# Altium PCB Test.PcbDoc (part 4 of 4)
Units mm, origin at the board's own origin, x right, y up, seen from the top; angles counter-clockwise.
Board outline 152.4 x 101.6 mm, 4 copper layers (Top Layer 1, Top Layer, Bottom Layer, Bottom Layer 1), stack 0.603 mm thick; 308 components, 154 nets, 859 pads, 6474 vias.
Unrouted connection lines stored in the file: 683.
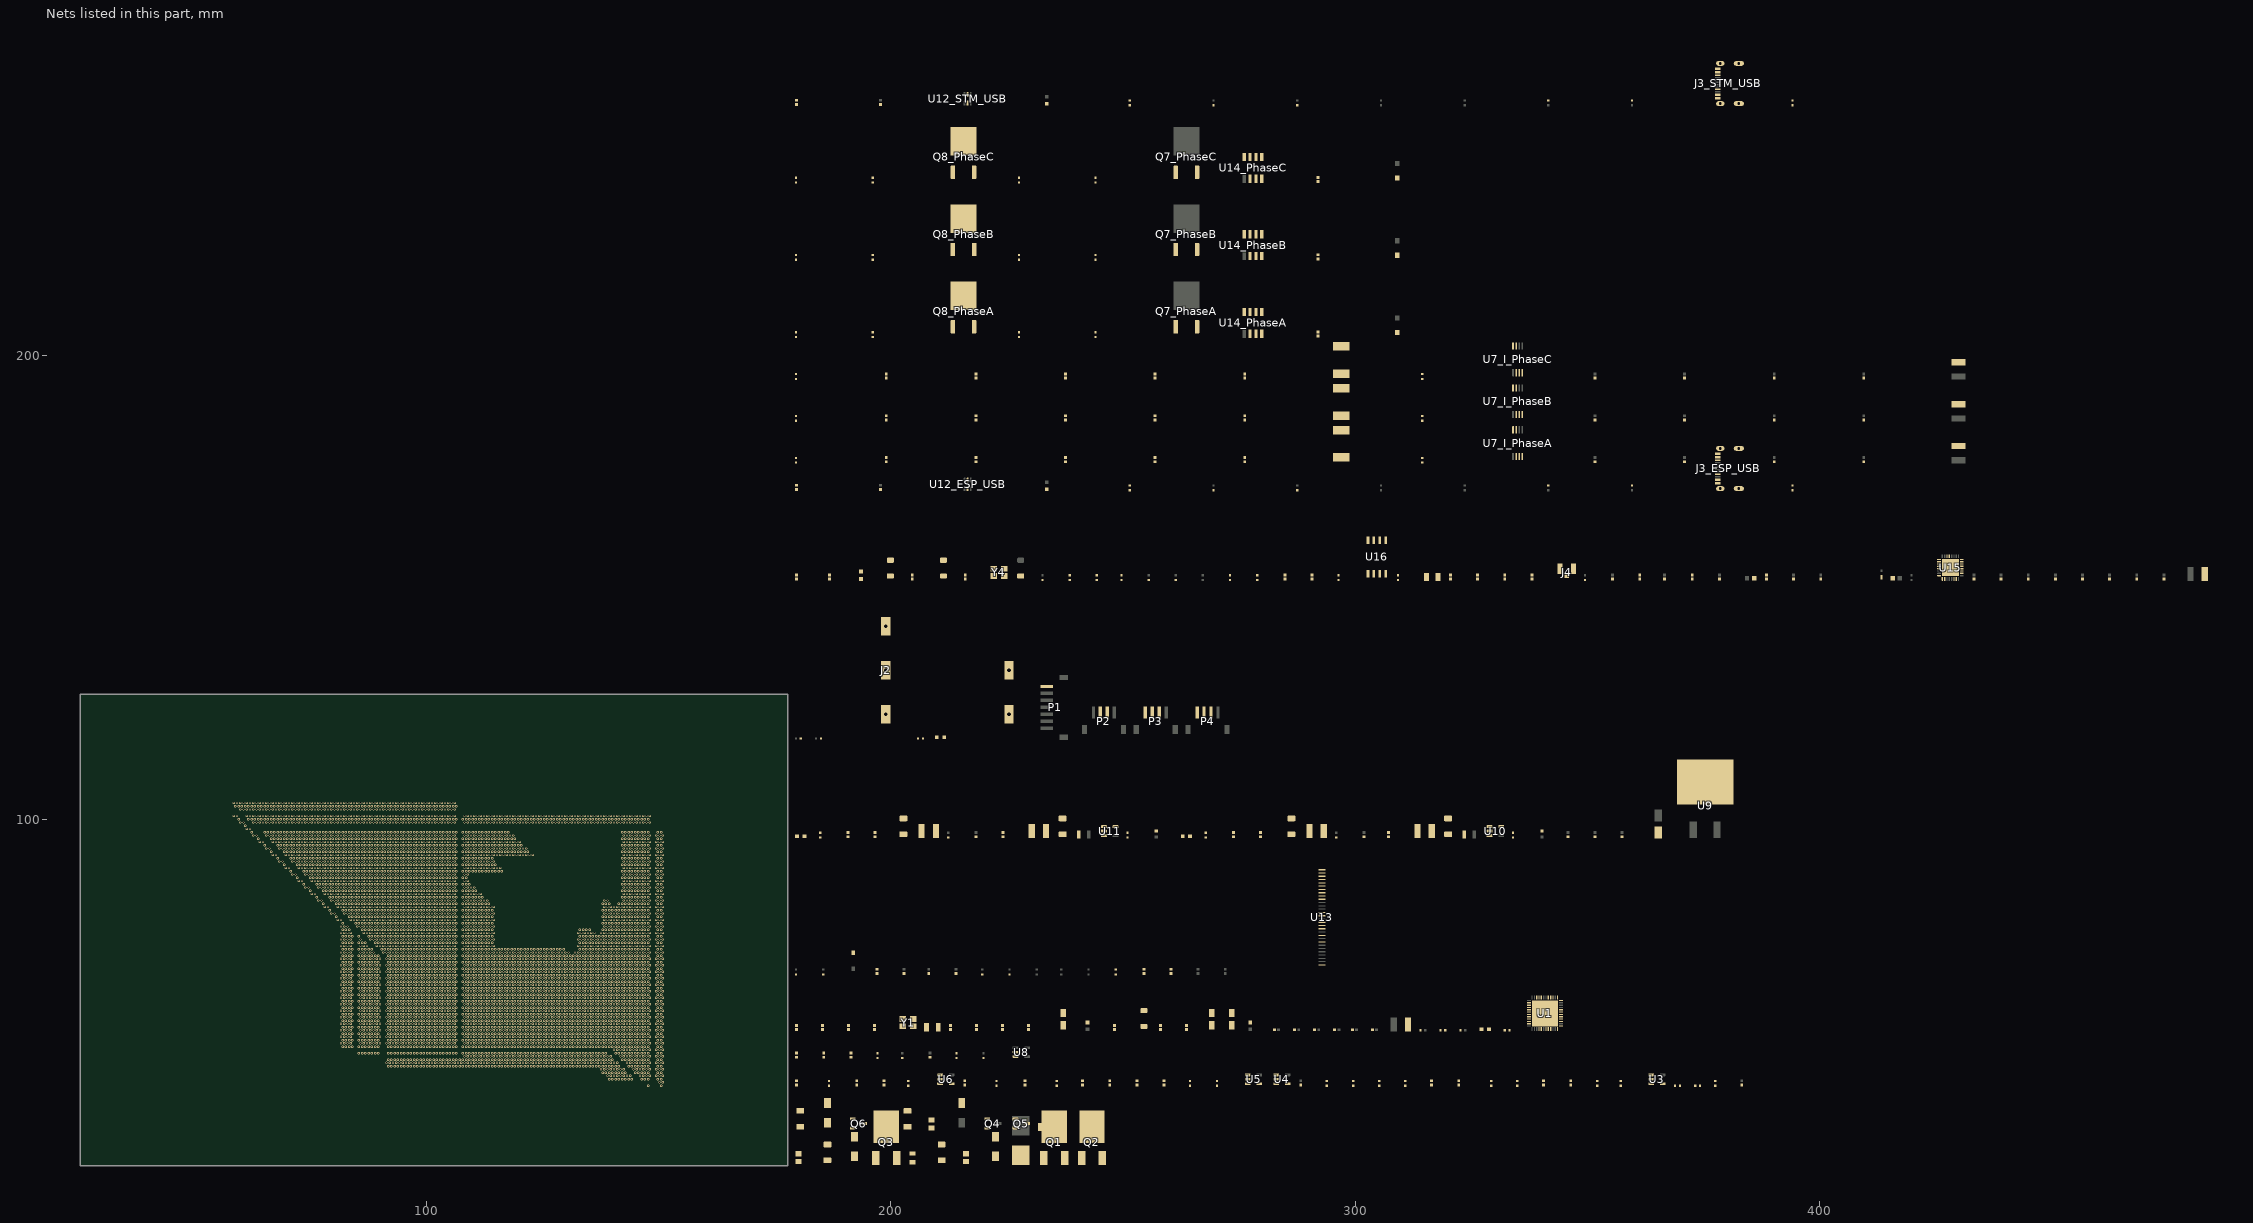
[diagram p6: the nets of this part, all layers, seen from the top]

## Via types
v1: diameter 0.5, hole 0.3, Top Layer 1 to Bottom Layer 1, tented both sides, 6470 vias
v2: diameter 1.27, hole 0.711, Top Layer 1 to Bottom Layer 1, 4 vias

## Nets (pads, with @x,y where several pads share a name; then routed paths per layer and width w, separated by ;. In a path a pad name is that pad's centre, name@x,y a point inside that pad or via, vN(x,y) a via of type N, cw(c..) or ccw(c..) an arc to the next point about the centre after c; other vN are vias at no path point) (continued)
GND: (continued)
  other v1: 75.95,84 78.05,84 78.75,84 79.45,84 80.15,84 80.85,84 81.55,84 82.25,84 82.95,84 83.65,84 84.35,84 85.05,84 85.75,84 86.45,84 87.15,84 87.85,84 88.55,84 89.25,84 89.95,84 90.65,84 91.35,84 92.05,84 92.75,84 93.45,84 94.15,84 94.85,84 95.55,84 96.25,84 96.95,84 97.65,84 98.35,84 99.05,84 99.75,84 100.45,84 101.15,84 101.85,84 102.55,84 103.25,84 103.95,84 104.65,84 105.35,84 106.05,84 108.15,84 108.85,84 109.55,84 110.25,84 110.95,84 111.65,84 142.45,84 143.15,84 143.85,84 144.55,84 145.25,84 145.95,84 146.65,84 147.35,84 148.05,84 149.45,84 150.15,84 150.85,84 74.9,84.7 77.7,84.7 78.4,84.7 79.1,84.7 79.8,84.7 80.5,84.7 81.2,84.7 81.9,84.7 82.6,84.7 83.3,84.7 84,84.7 84.7,84.7 85.4,84.7 86.1,84.7 86.8,84.7 87.5,84.7 88.2,84.7 88.9,84.7 89.6,84.7 90.3,84.7 91,84.7 91.7,84.7 92.4,84.7 93.1,84.7 93.8,84.7 94.5,84.7 95.2,84.7 95.9,84.7 96.6,84.7 97.3,84.7 98,84.7 98.7,84.7 99.4,84.7 100.1,84.7 100.8,84.7 101.5,84.7 102.2,84.7 102.9,84.7 103.6,84.7 104.3,84.7 105,84.7 105.7,84.7 106.4,84.7 107.8,84.7 108.5,84.7 109.2,84.7 109.9,84.7 110.6,84.7 142.1,84.7 142.8,84.7 143.5,84.7 144.2,84.7 144.9,84.7 145.6,84.7 146.3,84.7 147,84.7 147.7,84.7 149.8,84.7 150.5,84.7 73.85,85.4 74.55,85.4 76.65,85.4 77.35,85.4 78.05,85.4 78.75,85.4 79.45,85.4 80.15,85.4 80.85,85.4 81.55,85.4 82.25,85.4 82.95,85.4 83.65,85.4 84.35,85.4 85.05,85.4 85.75,85.4 86.45,85.4 87.15,85.4 87.85,85.4 88.55,85.4 89.25,85.4 89.95,85.4 90.65,85.4 91.35,85.4 92.05,85.4 92.75,85.4 93.45,85.4 94.15,85.4 94.85,85.4 95.55,85.4 96.25,85.4 96.95,85.4 97.65,85.4 98.35,85.4 99.05,85.4 99.75,85.4 100.45,85.4 101.15,85.4 101.85,85.4 102.55,85.4 103.25,85.4 103.95,85.4 104.65,85.4 105.35,85.4 106.05,85.4 108.15,85.4 108.85,85.4 109.55,85.4 110.25,85.4 142.45,85.4 143.15,85.4 143.85,85.4 144.55,85.4 145.25,85.4 145.95,85.4 146.65,85.4 147.35,85.4 148.05,85.4 149.45,85.4 150.15,85.4 150.85,85.4 73.5,86.1 76.3,86.1 77,86.1 77.7,86.1 78.4,86.1 79.1,86.1 79.8,86.1 80.5,86.1 81.2,86.1 81.9,86.1 82.6,86.1 83.3,86.1 84,86.1 84.7,86.1 85.4,86.1 86.1,86.1 86.8,86.1 87.5,86.1 88.2,86.1 88.9,86.1 89.6,86.1 90.3,86.1 91,86.1 91.7,86.1 92.4,86.1 93.1,86.1 93.8,86.1 94.5,86.1 95.2,86.1 95.9,86.1 96.6,86.1 97.3,86.1 98,86.1 98.7,86.1 99.4,86.1 100.1,86.1 100.8,86.1 101.5,86.1 102.2,86.1 102.9,86.1 103.6,86.1 104.3,86.1 105,86.1 105.7,86.1 106.4,86.1 107.8,86.1 108.5,86.1 109.2,86.1 142.1,86.1 142.8,86.1 143.5,86.1 144.2,86.1 144.9,86.1 145.6,86.1 146.3,86.1 147,86.1 147.7,86.1 149.8,86.1 150.5,86.1 72.45,86.8 73.15,86.8 75.25,86.8 75.95,86.8 76.65,86.8 77.35,86.8 78.05,86.8 78.75,86.8 79.45,86.8 80.15,86.8 80.85,86.8 81.55,86.8 82.25,86.8 82.95,86.8 83.65,86.8 84.35,86.8 85.05,86.8 85.75,86.8 86.45,86.8 87.15,86.8 87.85,86.8 88.55,86.8 89.25,86.8 89.95,86.8 90.65,86.8 91.35,86.8 92.05,86.8 92.75,86.8 93.45,86.8 94.15,86.8 94.85,86.8 95.55,86.8 96.25,86.8 96.95,86.8 97.65,86.8 98.35,86.8 99.05,86.8 99.75,86.8 100.45,86.8 101.15,86.8 101.85,86.8 102.55,86.8 103.25,86.8 103.95,86.8 104.65,86.8 105.35,86.8 106.05,86.8 108.15,86.8 108.85,86.8 142.45,86.8 143.15,86.8 143.85,86.8 144.55,86.8 145.25,86.8 145.95,86.8 146.65,86.8 147.35,86.8 148.05,86.8 149.45,86.8 150.15,86.8 150.85,86.8 72.1,87.5 74.9,87.5 75.6,87.5 76.3,87.5 77,87.5 77.7,87.5 78.4,87.5 79.1,87.5 79.8,87.5 80.5,87.5 81.2,87.5 81.9,87.5 82.6,87.5 83.3,87.5 84,87.5 84.7,87.5 85.4,87.5 86.1,87.5 86.8,87.5 87.5,87.5 88.2,87.5 88.9,87.5 89.6,87.5 90.3,87.5 91,87.5 91.7,87.5 92.4,87.5 93.1,87.5 93.8,87.5 94.5,87.5 95.2,87.5 95.9,87.5 96.6,87.5 97.3,87.5 98,87.5 98.7,87.5 99.4,87.5 100.1,87.5 100.8,87.5 101.5,87.5 102.2,87.5 102.9,87.5 103.6,87.5 104.3,87.5 105,87.5 105.7,87.5 106.4,87.5 107.8,87.5 108.5,87.5 142.1,87.5 142.8,87.5 143.5,87.5 144.2,87.5 144.9,87.5 145.6,87.5 146.3,87.5 147,87.5 147.7,87.5 149.8,87.5 150.5,87.5 71.05,88.2 71.75,88.2 73.85,88.2 74.55,88.2 75.25,88.2 75.95,88.2 76.65,88.2 77.35,88.2 78.05,88.2 78.75,88.2 79.45,88.2 80.15,88.2 80.85,88.2 81.55,88.2 82.25,88.2 82.95,88.2 83.65,88.2 84.35,88.2 85.05,88.2 85.75,88.2 86.45,88.2 87.15,88.2 87.85,88.2 88.55,88.2 89.25,88.2 89.95,88.2 90.65,88.2 91.35,88.2 92.05,88.2 92.75,88.2 93.45,88.2 94.15,88.2 94.85,88.2 95.55,88.2 96.25,88.2 96.95,88.2 97.65,88.2 98.35,88.2 99.05,88.2 99.75,88.2 100.45,88.2 101.15,88.2 101.85,88.2 102.55,88.2 103.25,88.2 103.95,88.2 104.65,88.2 105.35,88.2 106.05,88.2 108.15,88.2 108.85,88.2 142.45,88.2 143.15,88.2 143.85,88.2 144.55,88.2 145.25,88.2 145.95,88.2 146.65,88.2 147.35,88.2 148.05,88.2 149.45,88.2 150.15,88.2 150.85,88.2 70.7,88.9 73.5,88.9 74.2,88.9 74.9,88.9 75.6,88.9 76.3,88.9 77,88.9 77.7,88.9 78.4,88.9 79.1,88.9 79.8,88.9 80.5,88.9 81.2,88.9 81.9,88.9 82.6,88.9 83.3,88.9 84,88.9 84.7,88.9 85.4,88.9 86.1,88.9 86.8,88.9 87.5,88.9 88.2,88.9 88.9,88.9 89.6,88.9 90.3,88.9 91,88.9 91.7,88.9 92.4,88.9 93.1,88.9 93.8,88.9 94.5,88.9 95.2,88.9 95.9,88.9 96.6,88.9 97.3,88.9 98,88.9 98.7,88.9 99.4,88.9 100.1,88.9 100.8,88.9 101.5,88.9 102.2,88.9 102.9,88.9 103.6,88.9 104.3,88.9 105,88.9 105.7,88.9 106.4,88.9 107.8,88.9 108.5,88.9 109.2,88.9 109.9,88.9 110.6,88.9 111.3,88.9 112,88.9 112.7,88.9 113.4,88.9 114.1,88.9 114.8,88.9 115.5,88.9 116.2,88.9 142.1,88.9 142.8,88.9 143.5,88.9 144.2,88.9 144.9,88.9 145.6,88.9 146.3,88.9 147,88.9 147.7,88.9 149.8,88.9 150.5,88.9 69.65,89.6 70.35,89.6 72.45,89.6 73.15,89.6 73.85,89.6 74.55,89.6 75.25,89.6 75.95,89.6 76.65,89.6 77.35,89.6 78.05,89.6 78.75,89.6 79.45,89.6 80.15,89.6 80.85,89.6 81.55,89.6 82.25,89.6 82.95,89.6 83.65,89.6 84.35,89.6 85.05,89.6 85.75,89.6 86.45,89.6 87.15,89.6 87.85,89.6 88.55,89.6 89.25,89.6 89.95,89.6 90.65,89.6 91.35,89.6 92.05,89.6 92.75,89.6 93.45,89.6 94.15,89.6 94.85,89.6 95.55,89.6 96.25,89.6 96.95,89.6 97.65,89.6 98.35,89.6 99.05,89.6 99.75,89.6 100.45,89.6 101.15,89.6 101.85,89.6 102.55,89.6 103.25,89.6 103.95,89.6 104.65,89.6 105.35,89.6 106.05,89.6 108.15,89.6 108.85,89.6 109.55,89.6 110.25,89.6 110.95,89.6 111.65,89.6 112.35,89.6 113.05,89.6 113.75,89.6 114.45,89.6 115.15,89.6 115.85,89.6 142.45,89.6 143.15,89.6 143.85,89.6 144.55,89.6 145.25,89.6 145.95,89.6 146.65,89.6 147.35,89.6 148.05,89.6 149.45,89.6 150.15,89.6 150.85,89.6 69.3,90.3 72.1,90.3 72.8,90.3 73.5,90.3 74.2,90.3 74.9,90.3 75.6,90.3 76.3,90.3 77,90.3 77.7,90.3 78.4,90.3 79.1,90.3 79.8,90.3 80.5,90.3 81.2,90.3 81.9,90.3 82.6,90.3 83.3,90.3 84,90.3 84.7,90.3 85.4,90.3 86.1,90.3 86.8,90.3 87.5,90.3 88.2,90.3 88.9,90.3 89.6,90.3 90.3,90.3 91,90.3 91.7,90.3 92.4,90.3 93.1,90.3 93.8,90.3 94.5,90.3 95.2,90.3 95.9,90.3 96.6,90.3 97.3,90.3 98,90.3 98.7,90.3 99.4,90.3 100.1,90.3 100.8,90.3 101.5,90.3 102.2,90.3 102.9,90.3 103.6,90.3 104.3,90.3 105,90.3 105.7,90.3 106.4,90.3 107.8,90.3 108.5,90.3 109.2,90.3 109.9,90.3 110.6,90.3 111.3,90.3 112,90.3 112.7,90.3 113.4,90.3 114.1,90.3 114.8,90.3 142.1,90.3 142.8,90.3 143.5,90.3 144.2,90.3 144.9,90.3 145.6,90.3 146.3,90.3 147,90.3 147.7,90.3 149.8,90.3 150.5,90.3 68.25,91 68.95,91 71.05,91 71.75,91 72.45,91 73.15,91 73.85,91 74.55,91 75.25,91 75.95,91 76.65,91 77.35,91 78.05,91 78.75,91 79.45,91 80.15,91 80.85,91 81.55,91 82.25,91 82.95,91 83.65,91 84.35,91 85.05,91 85.75,91 86.45,91 87.15,91 87.85,91 88.55,91 89.25,91 89.95,91 90.65,91 91.35,91 92.05,91 92.75,91 93.45,91 94.15,91 94.85,91 95.55,91 96.25,91 96.95,91 97.65,91 98.35,91 99.05,91 99.75,91 100.45,91 101.15,91 101.85,91 102.55,91 103.25,91 103.95,91 104.65,91 105.35,91 106.05,91 108.15,91 108.85,91 109.55,91 110.25,91 110.95,91 111.65,91 112.35,91 113.05,91 113.75,91 114.45,91 142.45,91 143.15,91 143.85,91 144.55,91 145.25,91 145.95,91 146.65,91 147.35,91 148.05,91 149.45,91 150.15,91 150.85,91 67.9,91.7 70.7,91.7 71.4,91.7 72.1,91.7 72.8,91.7 73.5,91.7 74.2,91.7 74.9,91.7 75.6,91.7 76.3,91.7 77,91.7 77.7,91.7 78.4,91.7 79.1,91.7 79.8,91.7 80.5,91.7 81.2,91.7 81.9,91.7 82.6,91.7 83.3,91.7 84,91.7 84.7,91.7 85.4,91.7 86.1,91.7 86.8,91.7 87.5,91.7 88.2,91.7 88.9,91.7 89.6,91.7 90.3,91.7 91,91.7 91.7,91.7 92.4,91.7 93.1,91.7 93.8,91.7 94.5,91.7 95.2,91.7 95.9,91.7 96.6,91.7 97.3,91.7 98,91.7 98.7,91.7 99.4,91.7 100.1,91.7 100.8,91.7 101.5,91.7 102.2,91.7 102.9,91.7 103.6,91.7 104.3,91.7 105,91.7 105.7,91.7 106.4,91.7 107.8,91.7 108.5,91.7 109.2,91.7 109.9,91.7 110.6,91.7 111.3,91.7 112,91.7 112.7,91.7 113.4,91.7 114.1,91.7 142.1,91.7 142.8,91.7 143.5,91.7 144.2,91.7 144.9,91.7 145.6,91.7 146.3,91.7 147,91.7 147.7,91.7 149.8,91.7 150.5,91.7 66.85,92.4 67.55,92.4 69.65,92.4 70.35,92.4 71.05,92.4 71.75,92.4 72.45,92.4 73.15,92.4 73.85,92.4 74.55,92.4 75.25,92.4 75.95,92.4 76.65,92.4 77.35,92.4 78.05,92.4 78.75,92.4 79.45,92.4 80.15,92.4 80.85,92.4 81.55,92.4 82.25,92.4 82.95,92.4 83.65,92.4 84.35,92.4 85.05,92.4 85.75,92.4 86.45,92.4 87.15,92.4 87.85,92.4 88.55,92.4 89.25,92.4 89.95,92.4 90.65,92.4 91.35,92.4 92.05,92.4 92.75,92.4 93.45,92.4 94.15,92.4 94.85,92.4 95.55,92.4 96.25,92.4 96.95,92.4 97.65,92.4 98.35,92.4 99.05,92.4 99.75,92.4 100.45,92.4 101.15,92.4 101.85,92.4 102.55,92.4 103.25,92.4 103.95,92.4 104.65,92.4 105.35,92.4 106.05,92.4 108.15,92.4 108.85,92.4 109.55,92.4 110.25,92.4 110.95,92.4 111.65,92.4 112.35,92.4 113.05,92.4 113.75,92.4 114.45,92.4 115.15,92.4 115.85,92.4 116.55,92.4 117.25,92.4 117.95,92.4 118.65,92.4 119.35,92.4 120.05,92.4 120.75,92.4 121.45,92.4 122.15,92.4 122.85,92.4 142.45,92.4 143.15,92.4 143.85,92.4 144.55,92.4 145.25,92.4 145.95,92.4 146.65,92.4 147.35,92.4 148.05,92.4 149.45,92.4 150.15,92.4 150.85,92.4 66.5,93.1 69.3,93.1 70,93.1 70.7,93.1 71.4,93.1 72.1,93.1 72.8,93.1 73.5,93.1 74.2,93.1 74.9,93.1 75.6,93.1 76.3,93.1 77,93.1 77.7,93.1 78.4,93.1 79.1,93.1 79.8,93.1 80.5,93.1 81.2,93.1 81.9,93.1 82.6,93.1 83.3,93.1 84,93.1 84.7,93.1 85.4,93.1 86.1,93.1 86.8,93.1 87.5,93.1 88.2,93.1 88.9,93.1 89.6,93.1 90.3,93.1 91,93.1 91.7,93.1 92.4,93.1 93.1,93.1 93.8,93.1 94.5,93.1 95.2,93.1 95.9,93.1 96.6,93.1 97.3,93.1 98,93.1 98.7,93.1 99.4,93.1 100.1,93.1 100.8,93.1 101.5,93.1 102.2,93.1 102.9,93.1 103.6,93.1 104.3,93.1 105,93.1 105.7,93.1 106.4,93.1 107.8,93.1 108.5,93.1 109.2,93.1 109.9,93.1 110.6,93.1 111.3,93.1 112,93.1 112.7,93.1 113.4,93.1 114.1,93.1 114.8,93.1 115.5,93.1 116.2,93.1 116.9,93.1 117.6,93.1 118.3,93.1 119,93.1 119.7,93.1 120.4,93.1 121.1,93.1 121.8,93.1 142.1,93.1 142.8,93.1 143.5,93.1 144.2,93.1 144.9,93.1 145.6,93.1 146.3,93.1 147,93.1 147.7,93.1 149.8,93.1 150.5,93.1 65.45,93.8 66.15,93.8 68.25,93.8 68.95,93.8 69.65,93.8 70.35,93.8 71.05,93.8 71.75,93.8 72.45,93.8 73.15,93.8 73.85,93.8 74.55,93.8 75.25,93.8 75.95,93.8 76.65,93.8 77.35,93.8 78.05,93.8 78.75,93.8 79.45,93.8 80.15,93.8 80.85,93.8 81.55,93.8 82.25,93.8 82.95,93.8 83.65,93.8 84.35,93.8 85.05,93.8 85.75,93.8 86.45,93.8 87.15,93.8 87.85,93.8 88.55,93.8 89.25,93.8 89.95,93.8 90.65,93.8 91.35,93.8 92.05,93.8 92.75,93.8 93.45,93.8 94.15,93.8 94.85,93.8 95.55,93.8 96.25,93.8 96.95,93.8 97.65,93.8 98.35,93.8 99.05,93.8 99.75,93.8 100.45,93.8 101.15,93.8 101.85,93.8 102.55,93.8 103.25,93.8 103.95,93.8 104.65,93.8 105.35,93.8 106.05,93.8 108.15,93.8 108.85,93.8 109.55,93.8 110.25,93.8 110.95,93.8 111.65,93.8 112.35,93.8 113.05,93.8 113.75,93.8 114.45,93.8 115.15,93.8 115.85,93.8 116.55,93.8 117.25,93.8 117.95,93.8 118.65,93.8 119.35,93.8 120.05,93.8 120.75,93.8 121.45,93.8 142.45,93.8 143.15,93.8 143.85,93.8 144.55,93.8 145.25,93.8 145.95,93.8 146.65,93.8 147.35,93.8 148.05,93.8 149.45,93.8 150.15,93.8 150.85,93.8 65.1,94.5 67.9,94.5 68.6,94.5 69.3,94.5 70,94.5 70.7,94.5 71.4,94.5 72.1,94.5 72.8,94.5 73.5,94.5 74.2,94.5 74.9,94.5 75.6,94.5 76.3,94.5 77,94.5 77.7,94.5 78.4,94.5 79.1,94.5 79.8,94.5 80.5,94.5 81.2,94.5 81.9,94.5 82.6,94.5 83.3,94.5 84,94.5 84.7,94.5 85.4,94.5 86.1,94.5 86.8,94.5 87.5,94.5 88.2,94.5 88.9,94.5 89.6,94.5 90.3,94.5 91,94.5 91.7,94.5 92.4,94.5 93.1,94.5 93.8,94.5 94.5,94.5 95.2,94.5 95.9,94.5 96.6,94.5 97.3,94.5 98,94.5 98.7,94.5 99.4,94.5 100.1,94.5 100.8,94.5 101.5,94.5 102.2,94.5 102.9,94.5 103.6,94.5 104.3,94.5 105,94.5 105.7,94.5 106.4,94.5 107.8,94.5 108.5,94.5 109.2,94.5 109.9,94.5 110.6,94.5 111.3,94.5 112,94.5 112.7,94.5 113.4,94.5 114.1,94.5 114.8,94.5 115.5,94.5 116.2,94.5 116.9,94.5 117.6,94.5 118.3,94.5 119,94.5 119.7,94.5 120.4,94.5 142.1,94.5 142.8,94.5 143.5,94.5 144.2,94.5 144.9,94.5 145.6,94.5 146.3,94.5 147,94.5 147.7,94.5 149.8,94.5 150.5,94.5 64.05,95.2 64.75,95.2 66.85,95.2 67.55,95.2 68.25,95.2 68.95,95.2 69.65,95.2 70.35,95.2 71.05,95.2 71.75,95.2 72.45,95.2 73.15,95.2 73.85,95.2 74.55,95.2 75.25,95.2 75.95,95.2 76.65,95.2 77.35,95.2 78.05,95.2 78.75,95.2 79.45,95.2 80.15,95.2 80.85,95.2 81.55,95.2 82.25,95.2 82.95,95.2 83.65,95.2 84.35,95.2 85.05,95.2 85.75,95.2 86.45,95.2 87.15,95.2 87.85,95.2 88.55,95.2 89.25,95.2 89.95,95.2 90.65,95.2 91.35,95.2 92.05,95.2 92.75,95.2 93.45,95.2 94.15,95.2 94.85,95.2 95.55,95.2 96.25,95.2 96.95,95.2 97.65,95.2 98.35,95.2 99.05,95.2 99.75,95.2 100.45,95.2 101.15,95.2 101.85,95.2 102.55,95.2 103.25,95.2 103.95,95.2 104.65,95.2 105.35,95.2 106.05,95.2 108.15,95.2 108.85,95.2 109.55,95.2 110.25,95.2 110.95,95.2 111.65,95.2 112.35,95.2 113.05,95.2 113.75,95.2 114.45,95.2 115.15,95.2 115.85,95.2 116.55,95.2 117.25,95.2 117.95,95.2 118.65,95.2 119.35,95.2 120.05,95.2 142.45,95.2 143.15,95.2 143.85,95.2 144.55,95.2 145.25,95.2 145.95,95.2 146.65,95.2 147.35,95.2 148.05,95.2 149.45,95.2 150.15,95.2 150.85,95.2 63.7,95.9 66.5,95.9 67.2,95.9 67.9,95.9 68.6,95.9 69.3,95.9 70,95.9 70.7,95.9 71.4,95.9 72.1,95.9 72.8,95.9 73.5,95.9 74.2,95.9 74.9,95.9 75.6,95.9 76.3,95.9 77,95.9 77.7,95.9 78.4,95.9 79.1,95.9 79.8,95.9 80.5,95.9 81.2,95.9 81.9,95.9 82.6,95.9 83.3,95.9 84,95.9 84.7,95.9 85.4,95.9 86.1,95.9 86.8,95.9 87.5,95.9 88.2,95.9 88.9,95.9 89.6,95.9 90.3,95.9 91,95.9 91.7,95.9 92.4,95.9 93.1,95.9 93.8,95.9 94.5,95.9 95.2,95.9 95.9,95.9 96.6,95.9 97.3,95.9 98,95.9 98.7,95.9 99.4,95.9 100.1,95.9 100.8,95.9 101.5,95.9 102.2,95.9 102.9,95.9 103.6,95.9 104.3,95.9 105,95.9 105.7,95.9 106.4,95.9 107.8,95.9 108.5,95.9 109.2,95.9 109.9,95.9 110.6,95.9 111.3,95.9 112,95.9 112.7,95.9 113.4,95.9 114.1,95.9 114.8,95.9 115.5,95.9 116.2,95.9 116.9,95.9 117.6,95.9 118.3,95.9 119,95.9 142.1,95.9 142.8,95.9 143.5,95.9 144.2,95.9 144.9,95.9 145.6,95.9 146.3,95.9 147,95.9 147.7,95.9 149.8,95.9 150.5,95.9 62.65,96.6 63.35,96.6 65.45,96.6 66.15,96.6 66.85,96.6 67.55,96.6 68.25,96.6 68.95,96.6 69.65,96.6 70.35,96.6 71.05,96.6 71.75,96.6 72.45,96.6 73.15,96.6 73.85,96.6 74.55,96.6 75.25,96.6 75.95,96.6 76.65,96.6 77.35,96.6 78.05,96.6 78.75,96.6 79.45,96.6 80.15,96.6 80.85,96.6 81.55,96.6 82.25,96.6 82.95,96.6 83.65,96.6 84.35,96.6 85.05,96.6 85.75,96.6 86.45,96.6 87.15,96.6 87.85,96.6 88.55,96.6 89.25,96.6 89.95,96.6 90.65,96.6 91.35,96.6 92.05,96.6 92.75,96.6 93.45,96.6 94.15,96.6 94.85,96.6 95.55,96.6 96.25,96.6 96.95,96.6 97.65,96.6 98.35,96.6 99.05,96.6 99.75,96.6 100.45,96.6 101.15,96.6 101.85,96.6 102.55,96.6 103.25,96.6 103.95,96.6 104.65,96.6 105.35,96.6 106.05,96.6 108.15,96.6 108.85,96.6 109.55,96.6 110.25,96.6 110.95,96.6 111.65,96.6 112.35,96.6 113.05,96.6 113.75,96.6 114.45,96.6 115.15,96.6 115.85,96.6 116.55,96.6 117.25,96.6 117.95,96.6 118.65,96.6 142.45,96.6 143.15,96.6 143.85,96.6 144.55,96.6 145.25,96.6 145.95,96.6 146.65,96.6 147.35,96.6 148.05,96.6 149.45,96.6 150.15,96.6 150.85,96.6 62.3,97.3 65.1,97.3 65.8,97.3 66.5,97.3 67.2,97.3 67.9,97.3 68.6,97.3 69.3,97.3 70,97.3 70.7,97.3 71.4,97.3 72.1,97.3 72.8,97.3 73.5,97.3 74.2,97.3 74.9,97.3 75.6,97.3 76.3,97.3 77,97.3 77.7,97.3 78.4,97.3 79.1,97.3 79.8,97.3 80.5,97.3 81.2,97.3 81.9,97.3 82.6,97.3 83.3,97.3 84,97.3 84.7,97.3 85.4,97.3 86.1,97.3 86.8,97.3 87.5,97.3 88.2,97.3 88.9,97.3 89.6,97.3 90.3,97.3 91,97.3 91.7,97.3 92.4,97.3 93.1,97.3 93.8,97.3 94.5,97.3 95.2,97.3 95.9,97.3 96.6,97.3 97.3,97.3 98,97.3 98.7,97.3 99.4,97.3 100.1,97.3 100.8,97.3 101.5,97.3 102.2,97.3 102.9,97.3 103.6,97.3 104.3,97.3 105,97.3 105.7,97.3 106.4,97.3 107.8,97.3 108.5,97.3 109.2,97.3 109.9,97.3 110.6,97.3 111.3,97.3 112,97.3 112.7,97.3 113.4,97.3 114.1,97.3 114.8,97.3 115.5,97.3 116.2,97.3 116.9,97.3 117.6,97.3 142.1,97.3 142.8,97.3 143.5,97.3 144.2,97.3 144.9,97.3 145.6,97.3 146.3,97.3 147,97.3 147.7,97.3 149.8,97.3 150.5,97.3 61.25,98 61.95,98 60.9,98.7 59.85,99.4 60.55,99.4 62.65,99.4 63.35,99.4 64.05,99.4 64.75,99.4 65.45,99.4 66.15,99.4 66.85,99.4 67.55,99.4 68.25,99.4 68.95,99.4 69.65,99.4 70.35,99.4 71.05,99.4 71.75,99.4 72.45,99.4 73.15,99.4 73.85,99.4 74.55,99.4 75.25,99.4 75.95,99.4 76.65,99.4 77.35,99.4 78.05,99.4 78.75,99.4 79.45,99.4 80.15,99.4 80.85,99.4 81.55,99.4 82.25,99.4 82.95,99.4 83.65,99.4 84.35,99.4 85.05,99.4 85.75,99.4 86.45,99.4 87.15,99.4 87.85,99.4 88.55,99.4 89.25,99.4 89.95,99.4 90.65,99.4 91.35,99.4 92.05,99.4 92.75,99.4 93.45,99.4 94.15,99.4 94.85,99.4 95.55,99.4 96.25,99.4 96.95,99.4 97.65,99.4 98.35,99.4 99.05,99.4 99.75,99.4 100.45,99.4 101.15,99.4 101.85,99.4 102.55,99.4 103.25,99.4 103.95,99.4 104.65,99.4 105.35,99.4 106.05,99.4 108.15,99.4 108.85,99.4 109.55,99.4 110.25,99.4 110.95,99.4 111.65,99.4 112.35,99.4 113.05,99.4 113.75,99.4 114.45,99.4 115.15,99.4 115.85,99.4 116.55,99.4 117.25,99.4 117.95,99.4 118.65,99.4 119.35,99.4 120.05,99.4 120.75,99.4 121.45,99.4 122.15,99.4 122.85,99.4 123.55,99.4 124.25,99.4 124.95,99.4 125.65,99.4 126.35,99.4 127.05,99.4 127.75,99.4 128.45,99.4 129.15,99.4 129.85,99.4 130.55,99.4 131.25,99.4 131.95,99.4 132.65,99.4 133.35,99.4 134.05,99.4 134.75,99.4 135.45,99.4 136.15,99.4 136.85,99.4 137.55,99.4 138.25,99.4 138.95,99.4 139.65,99.4 140.35,99.4 141.05,99.4 141.75,99.4 142.45,99.4 143.15,99.4 143.85,99.4 144.55,99.4 145.25,99.4 145.95,99.4 146.65,99.4 147.35,99.4 148.05,99.4 59.5,100.1 61.6,100.1 62.3,100.1 63,100.1 63.7,100.1 64.4,100.1 65.1,100.1 65.8,100.1 66.5,100.1 67.2,100.1 67.9,100.1 68.6,100.1 69.3,100.1 70,100.1 70.7,100.1 71.4,100.1 72.1,100.1 72.8,100.1 73.5,100.1 74.2,100.1 74.9,100.1 75.6,100.1 76.3,100.1 77,100.1 77.7,100.1 78.4,100.1 79.1,100.1 79.8,100.1 80.5,100.1 81.2,100.1 81.9,100.1 82.6,100.1 83.3,100.1 84,100.1 84.7,100.1 85.4,100.1 86.1,100.1 86.8,100.1 87.5,100.1 88.2,100.1 88.9,100.1 89.6,100.1 90.3,100.1 91,100.1 91.7,100.1 92.4,100.1 93.1,100.1 93.8,100.1 94.5,100.1 95.2,100.1 95.9,100.1 96.6,100.1 97.3,100.1 98,100.1 98.7,100.1 99.4,100.1 100.1,100.1 100.8,100.1 101.5,100.1 102.2,100.1 102.9,100.1 103.6,100.1 104.3,100.1 105,100.1 105.7,100.1 106.4,100.1 107.8,100.1 108.5,100.1 109.2,100.1 109.9,100.1 110.6,100.1 111.3,100.1 112,100.1 112.7,100.1 113.4,100.1 114.1,100.1 114.8,100.1 115.5,100.1 116.2,100.1 116.9,100.1 117.6,100.1 118.3,100.1 119,100.1 119.7,100.1 120.4,100.1 121.1,100.1 121.8,100.1 122.5,100.1 123.2,100.1 123.9,100.1 124.6,100.1 125.3,100.1 126,100.1 126.7,100.1 127.4,100.1 128.1,100.1 128.8,100.1 129.5,100.1 130.2,100.1 130.9,100.1 131.6,100.1 132.3,100.1 133,100.1 133.7,100.1 134.4,100.1 135.1,100.1 135.8,100.1 136.5,100.1 137.2,100.1 137.9,100.1 138.6,100.1 139.3,100.1 140,100.1 140.7,100.1 141.4,100.1 142.1,100.1 142.8,100.1 143.5,100.1 144.2,100.1 144.9,100.1 145.6,100.1 146.3,100.1 147,100.1 147.7,100.1 58.45,100.8 59.15,100.8 61.25,100.8 61.95,100.8 62.65,100.8 63.35,100.8 64.05,100.8 64.75,100.8 65.45,100.8 66.15,100.8 66.85,100.8 67.55,100.8 68.25,100.8 68.95,100.8 69.65,100.8 70.35,100.8 71.05,100.8 71.75,100.8 72.45,100.8 73.15,100.8 73.85,100.8 74.55,100.8 75.25,100.8 75.95,100.8 76.65,100.8 77.35,100.8 78.05,100.8 78.75,100.8 79.45,100.8 80.15,100.8 80.85,100.8 81.55,100.8 82.25,100.8 82.95,100.8 83.65,100.8 84.35,100.8 85.05,100.8 85.75,100.8 86.45,100.8 87.15,100.8 87.85,100.8 88.55,100.8 89.25,100.8 89.95,100.8 90.65,100.8 91.35,100.8 92.05,100.8 92.75,100.8 93.45,100.8 94.15,100.8 94.85,100.8 95.55,100.8 96.25,100.8 96.95,100.8 97.65,100.8 98.35,100.8 99.05,100.8 99.75,100.8 100.45,100.8 101.15,100.8 101.85,100.8 102.55,100.8 103.25,100.8 103.95,100.8 104.65,100.8 105.35,100.8 106.05,100.8 108.15,100.8 108.85,100.8 109.55,100.8 110.25,100.8 110.95,100.8 111.65,100.8 112.35,100.8 113.05,100.8 113.75,100.8 114.45,100.8 115.15,100.8 115.85,100.8 116.55,100.8 117.25,100.8 117.95,100.8 118.65,100.8 119.35,100.8 120.05,100.8 120.75,100.8 121.45,100.8 122.15,100.8 122.85,100.8 123.55,100.8 124.25,100.8 124.95,100.8 125.65,100.8 126.35,100.8 127.05,100.8 127.75,100.8 128.45,100.8 129.15,100.8 129.85,100.8 130.55,100.8 131.25,100.8 131.95,100.8 132.65,100.8 133.35,100.8 134.05,100.8 134.75,100.8 135.45,100.8 136.15,100.8 136.85,100.8 137.55,100.8 138.25,100.8 138.95,100.8 139.65,100.8 140.35,100.8 141.05,100.8 141.75,100.8 142.45,100.8 143.15,100.8 143.85,100.8 144.55,100.8 145.25,100.8 145.95,100.8 146.65,100.8 147.35,100.8 148.05,100.8 59.85,102.2 60.55,102.2 61.25,102.2 61.95,102.2 62.65,102.2 63.35,102.2 64.05,102.2 64.75,102.2 65.45,102.2 66.15,102.2 66.85,102.2 67.55,102.2 68.25,102.2 68.95,102.2 69.65,102.2 70.35,102.2 71.05,102.2 71.75,102.2 72.45,102.2 73.15,102.2 73.85,102.2 74.55,102.2 75.25,102.2 75.95,102.2 76.65,102.2 77.35,102.2 78.05,102.2 78.75,102.2 79.45,102.2 80.15,102.2 80.85,102.2 81.55,102.2 82.25,102.2 82.95,102.2 83.65,102.2 84.35,102.2 85.05,102.2 85.75,102.2 86.45,102.2 87.15,102.2 87.85,102.2 88.55,102.2 89.25,102.2 89.95,102.2 90.65,102.2 91.35,102.2 92.05,102.2 92.75,102.2 93.45,102.2 94.15,102.2 94.85,102.2 95.55,102.2 96.25,102.2 96.95,102.2 97.65,102.2 98.35,102.2 99.05,102.2 99.75,102.2 100.45,102.2 101.15,102.2 101.85,102.2 102.55,102.2 103.25,102.2 103.95,102.2 104.65,102.2 105.35,102.2 106.05,102.2 58.8,102.9 59.5,102.9 60.2,102.9 60.9,102.9 61.6,102.9 62.3,102.9 63,102.9 63.7,102.9 64.4,102.9 65.1,102.9 65.8,102.9 66.5,102.9 67.2,102.9 67.9,102.9 68.6,102.9 69.3,102.9 70,102.9 70.7,102.9 71.4,102.9 72.1,102.9 72.8,102.9 73.5,102.9 74.2,102.9 74.9,102.9 75.6,102.9 76.3,102.9 77,102.9 77.7,102.9 78.4,102.9 79.1,102.9 79.8,102.9 80.5,102.9 81.2,102.9 81.9,102.9 82.6,102.9 83.3,102.9 84,102.9 84.7,102.9 85.4,102.9 86.1,102.9 86.8,102.9 87.5,102.9 88.2,102.9 88.9,102.9 89.6,102.9 90.3,102.9 91,102.9 91.7,102.9 92.4,102.9 93.1,102.9 93.8,102.9 94.5,102.9 95.2,102.9 95.9,102.9 96.6,102.9 97.3,102.9 98,102.9 98.7,102.9 99.4,102.9 100.1,102.9 100.8,102.9 101.5,102.9 102.2,102.9 102.9,102.9 103.6,102.9 104.3,102.9 105,102.9 105.7,102.9 106.4,102.9 58.45,103.6 59.15,103.6 59.85,103.6 60.55,103.6 61.25,103.6 61.95,103.6 62.65,103.6 63.35,103.6 64.05,103.6 64.75,103.6 65.45,103.6 66.15,103.6 66.85,103.6 67.55,103.6 68.25,103.6 68.95,103.6 69.65,103.6 70.35,103.6 71.05,103.6 71.75,103.6 72.45,103.6 73.15,103.6 73.85,103.6 74.55,103.6 75.25,103.6 75.95,103.6 76.65,103.6 77.35,103.6 78.05,103.6 78.75,103.6 79.45,103.6 80.15,103.6 80.85,103.6 81.55,103.6 82.25,103.6 82.95,103.6 83.65,103.6 84.35,103.6 85.05,103.6 85.75,103.6 86.45,103.6 87.15,103.6 87.85,103.6 88.55,103.6 89.25,103.6 89.95,103.6 90.65,103.6 91.35,103.6 92.05,103.6 92.75,103.6 93.45,103.6 94.15,103.6 94.85,103.6 95.55,103.6 96.25,103.6 96.95,103.6 97.65,103.6 98.35,103.6 99.05,103.6 99.75,103.6 100.45,103.6 101.15,103.6 101.85,103.6 102.55,103.6 103.25,103.6 103.95,103.6 104.65,103.6 105.35,103.6 106.05,103.6
GPIO3: R72.2 U15.8
GPIO8: C99.2 R68.1 U15.14 U19.2
GPIO9: C98.2 R67.1 U15.15 U18.2
LNA_IN: C91.2 J4.1 L2.2 U15.1
MCU3V3: R42_ESP_USB.2 R42_STM_USB.2 R43_ESP_USB.2 R43_STM_USB.2
NetC8_1: C8.1 C9.1 C10.2 C11.2 FB1.2 U1.21
NetC13_1: C13.1 C14.2 C15.2 C16.2 C102.2 FB2.2 U1.20
NetC22_2: C22.2 R12.1 U3.3
NetC26_2: C26.2 R19.1 U4.3
NetC28_2: C28.2 R20.1 U5.3
NetC30_2: C30.2 R23.1 U6.3
NetC37_I_PhaseA_2: C37_I_PhaseA.2 R25_I_PhaseA.1 R27_I_PhaseA.2 U7_I_PhaseA.8
NetC37_I_PhaseB_2: C37_I_PhaseB.2 R25_I_PhaseB.1 R27_I_PhaseB.2 U7_I_PhaseB.8
NetC37_I_PhaseC_2: C37_I_PhaseC.2 R25_I_PhaseC.1 R27_I_PhaseC.2 U7_I_PhaseC.8
NetC38_I_PhaseA_2: C38_I_PhaseA.2 C39_I_PhaseA.2 C40_I_PhaseA.2 C41_I_PhaseA.2 R25_I_PhaseA.2 U1.27
NetC38_I_PhaseB_2: C38_I_PhaseB.2 C39_I_PhaseB.2 C40_I_PhaseB.2 C41_I_PhaseB.2 R25_I_PhaseB.2 U1.25
NetC38_I_PhaseC_2: C38_I_PhaseC.2 C39_I_PhaseC.2 C40_I_PhaseC.2 C41_I_PhaseC.2 R25_I_PhaseC.2 U1.24
NetC43_2: C43.2 C44.2 C45.2 R29.1 U8.3
NetC50_1: C50.1 C52.2 D3.K FB3.2 R32.2 U10.1
NetC53_1: C53.1 C54.2 C55.2 D4.K F1.0 U10.5
NetC56_1: C56.1 C58.2 D6.K FB4.2 R35.2 U11.1
NetC59_1: C59.1 C60.2 C61.2 D7.K F2.0 U11.5
NetC68_2: C68.2 U13.27
NetC69_2: C69.2 U13.28
NetC70_2: C70.2 D17.A R53.1 U13.14
NetC74_PhaseA_1: C74_PhaseA.1 D18_PhaseA.K U14_PhaseA.8
NetC74_PhaseB_1: C74_PhaseB.1 D18_PhaseB.K U14_PhaseB.8
NetC74_PhaseC_1: C74_PhaseC.1 D18_PhaseC.K U14_PhaseC.8
NetC84_2: C84.2 L1.1 U15.2 U15.3
NetC103_2: C103.2 R14.2 U1.10 U3.1 U3.4
NetC104_2: C104.2 R21.2 U1.8 U4.1 U4.4
NetC105_2: C105.2 R22.2 U1.9 U5.1 U5.4
NetC106_2: C106.2 R24.2 U1.11 U6.1 U6.4
NetD1_2: D1.2 R1.1
NetD2_2: D2.2 R4.1
NetD5_2: D5.2 R33.1
NetD8_2: D8.2 R36.1
NetD9_A: D9.A D11.A
NetD10_A: D10.A Q1.1 R39.2
NetD10_K: D10.K Q1.3 Q2.3 Q3.3 R38.2
NetD12_K: D12.K Q3.1 R38.1
NetD13_A: D13.A D15.A
NetD14_K: D14.K Q4.2 Q5.2 Q6.2 R40.2
NetD16_K: D16.K Q6.1 R40.1
NetD19_2: D19.2 R72.1
NetF3_1: F3.1 Q2.4
NetF4_0: F4.0 Q5.3
NetJ3_ESP_USB_A5: J3_ESP_USB.A5 R41_ESP_USB.1
NetJ3_ESP_USB_B5: J3_ESP_USB.B5 R48_ESP_USB.2
NetJ3_STM_USB_A5: J3_STM_USB.A5 R41_STM_USB.1
NetJ3_STM_USB_B5: J3_STM_USB.B5 R48_STM_USB.2
NetQ7_PhaseA_1: Q7_PhaseA.1 R57_PhaseA.2 R58_PhaseA.2
NetQ7_PhaseB_1: Q7_PhaseB.1 R57_PhaseB.2 R58_PhaseB.2
NetQ7_PhaseC_1: Q7_PhaseC.1 R57_PhaseC.2 R58_PhaseC.2
NetQ8_PhaseA_1: Q8_PhaseA.1 R59_PhaseA.2 R60_PhaseA.2
NetQ8_PhaseA_3: Q8_PhaseA.3 R26_I_PhaseA.1 R60_PhaseA.1 U7_I_PhaseA.2
NetQ8_PhaseB_1: Q8_PhaseB.1 R59_PhaseB.2 R60_PhaseB.2
NetQ8_PhaseB_3: Q8_PhaseB.3 R26_I_PhaseB.1 R60_PhaseB.1 U7_I_PhaseB.2
NetQ8_PhaseC_1: Q8_PhaseC.1 R59_PhaseC.2 R60_PhaseC.2
NetQ8_PhaseC_3: Q8_PhaseC.3 R26_I_PhaseC.1 R60_PhaseC.1 U7_I_PhaseC.2
NetR1_2: R1.2 U1.19
NetR5_1: R5.1 R6.2 U1.46
NetR28_1: R28.1 R29.2 R31.2
NetR32_1: R32.1 R34.2 U10.3
NetR35_1: R35.1 R37.2 U11.3
NetR49_2: R49.2 U13.26
NetR57_PhaseA_1: R57_PhaseA.1 U14_PhaseA.7
NetR57_PhaseB_1: R57_PhaseB.1 U14_PhaseB.7
NetR57_PhaseC_1: R57_PhaseC.1 U14_PhaseC.7
NetR59_PhaseA_1: R59_PhaseA.1 U14_PhaseA.5
NetR59_PhaseB_1: R59_PhaseB.1 U14_PhaseB.5
NetR59_PhaseC_1: R59_PhaseC.1 U14_PhaseC.5
NetR63_2: R63.2 U16.1
NetR64_2: R64.2 U16.6
NetR65_2: R65.2 U16.5
NetR66_2: R66.2 U16.2
NetR70_2: R70.2 U16.3
NetR71_2: R71.2 U16.7
NetU1_2: U1.2 U14_PhaseA.3
NetU1_17: U1.17 U14_PhaseB.3
NetU1_28: U1.28 U14_PhaseC.3
NetU1_30: U1.30 U14_PhaseA.2
NetU1_31: U1.31 U14_PhaseB.2
NetU1_32: U1.32 U14_PhaseC.2
NetU1_41: U1.41
NetU15_9: U15.9
NetU15_10: U15.10
NeuVolt: C24.2 C31.2 R11.1 R13.1 R15.1 R23.2
OSC32_IN: C19.2 U1.3 Y2.1
OSC32_OUT: C20.2 U1.4 Y2.2
OSC_IN: C17.2 U1.5 Y1.1
OSC_OUT: C18.2 U1.6 Y1.3
PC4: R4.2 U1.16
PhaseA: C74_PhaseA.2 J2.1 Q7_PhaseA.3 Q8_PhaseA.4 R8.2 R58_PhaseA.1 U14_PhaseA.6
PhaseB: C74_PhaseB.2 J2.2 Q7_PhaseB.3 Q8_PhaseB.4 R9.2 R58_PhaseB.1 U14_PhaseB.6
PhaseC: C74_PhaseC.2 J2.3 Q7_PhaseC.3 Q8_PhaseC.4 R10.2 R58_PhaseC.1 U14_PhaseC.6
PhAVolt: C27.2 R8.1 R15.2 R16.2 R19.2
PhBVolt: C29.2 R9.1 R13.2 R17.2 R20.2
PhCVolt: C23.2 R10.1 R11.2 R12.2 R18.2
PWM_IN: P2.2 U1.29
RESET: C12.2 R7.1 U1.7 U2.2
SPICLK: R64.1 U15.22
SPICS0: R63.1 U15.21
SPID: R65.1 U15.23
SPIHD: R71.1 U15.19
SPIQ: R66.1 U15.24
SPIWP: R70.1 U15.20
ST_SWCLK: P4.1 U1.37
ST_SWDIO: P4.2 U1.36
ST_UART1_RX: P3.2 U1.45
ST_UART1_TX: P3.1 U1.44
ST_UART4_RX: R3.2 U1.40
ST_UART4_TX: R2.2 U1.39
USB5V: C64_ESP_USB.2 C64_STM_USB.2 FB5_ESP_USB.1 FB5_STM_USB.1 J3_ESP_USB.A4B9 J3_ESP_USB.B4A9 J3_STM_USB.A4B9 J3_STM_USB.B4A9 U12_ESP_USB.5 U12_STM_USB.5
VHin: C62.2 D9.C J1.2 Q1.4
Wifi_SPI_3V3: C88.2 C92.2 C93.2 C94.2 C95.2 R62.1 U15.18 U16.8
XTAL32_N: C97.2 U15.5 Y3.2
XTAL32_P: C96.2 U15.4 Y3.1
XTAL_N: C100.2 U15.29 Y4.1
XTAL_P: C101.2 U15.30 Y4.3
pads on no net: J3_ESP_USB.A8 J3_ESP_USB.B8 J3_STM_USB.A8 J3_STM_USB.B8 P1.MP1 P1.MP2 P2.MP1 P2.MP2 P3.MP1 P3.MP2 P4.MP1 P4.MP2 U1.1 U7_I_PhaseA.1 U7_I_PhaseB.1 U7_I_PhaseC.1 U10.4 U11.4 U12_ESP_USB.1 U12_ESP_USB.3 U12_STM_USB.1 U12_STM_USB.3 U13.7

## Polygon pours and split planes (outlines as drawn)
GND on Top Layer 1 "NONET_L02_P-001" (solid, pour order 1): 49.911,101.346 148.717,101.346 148.717,34.036 148.59,33.909 136.144,46.355 77.978,46.355 77.978,73.406 49.911,101.473
5Vin on Top Layer "NONET_L02_P-001" (solid, pour order 6): 118.745,97.663 118.872,97.79 141.097,97.79 141.097,82.804 140.462,82.169 139.065,83.566 124.714,83.566 124.714,91.694 118.872,97.536
GND on Top Layer "NONET_L02_P-001" (solid, pour order 0): 52.832,105.537 151.638,105.537 151.638,38.227 151.511,38.1 139.065,50.546 80.899,50.546 80.899,77.597 52.832,105.664
5Vin on Bottom Layer "NONET_L02_P-001" (solid, pour order 4): 114.808,91.44 114.935,91.567 137.16,91.567 137.16,76.581 136.525,75.946 135.128,77.343 120.777,77.343 120.777,85.471 114.935,91.313
GND on Bottom Layer "NONET_L02_P-001" (solid, pour order 2): 56.642,104.14 107.188,104.14 107.188,49.149 84.709,49.149 84.709,76.2 56.642,104.267
5Vin on Bottom Layer 1 "NONET_L02_P-001" (solid, pour order 5): 109.474,87.376 109.601,87.503 131.826,87.503 131.826,72.517 131.191,71.882 129.794,73.279 115.443,73.279 115.443,81.407 109.601,87.249
GND on Bottom Layer 1 "NONET_L02_P-001" (solid, pour order 3): 62.611,98.298 161.417,98.298 161.417,30.988 161.29,30.861 148.844,43.307 90.678,43.307 90.678,70.358 62.611,98.425

## Text inside footprints (layer, text, board x,y; h text height)
C46: Top Overlay "+" at 365.752,102.46 h1.22 r90
D1: Top Overlay "+" at 212.979,117.475 h0.76 r90
D2: Top Overlay "+" at 330.327,54.61 h0.76 r90
D5: Top Overlay "+" at 265.938,96.139 h0.76 r90
D8: Top Overlay "+" at 182.88,96.139 h0.76 r90
D19: Top Overlay "+" at 193.802,154.94 h0.76 r180
Q1: Mechanical 13 "1" at 232.791,29.477 h0.61; Mechanical 13 "2" at 235.001,29.477 h0.61; Mechanical 13 "3" at 237.185,29.477 h0.61; Mechanical 13 "4" at 234.874,33.846 h0.61
Q2: Mechanical 13 "1" at 240.919,29.477 h0.61; Mechanical 13 "2" at 243.129,29.477 h0.61; Mechanical 13 "3" at 245.313,29.477 h0.61; Mechanical 13 "4" at 243.002,33.846 h0.61
Q3: Mechanical 13 "1" at 196.596,29.477 h0.61; Mechanical 13 "2" at 198.806,29.477 h0.61; Mechanical 13 "3" at 200.99,29.477 h0.61; Mechanical 13 "4" at 198.679,33.846 h0.61